# Allegro board sensor.brd
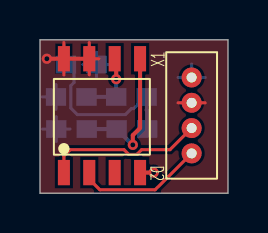
[diagram p0: board, top side]
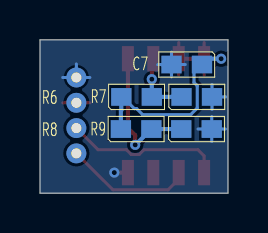
[diagram p1: board, bottom side, seen from below]

Outline 9.4 x 7.7 mm; copper layers: TOP, BOTTOM. Coordinates in mm from the lower left corner of the outline.
Outline path: 0,7.7 0,0 9.4,0 9.4,7.7 0,7.7

## Placement (name value [footprint] x y rotation side)
C7  0.1uF  [0402]  1.3 6.46 0 bottom
D2  TMP275  [SO8]  1.19 1.03 90 top
R6  10k  [0402]  5.33 4.83 180 bottom
R7  10k  [0402]  2.32 4.83 180 bottom
R8  10k  [0402]  5.36 3.22 180 bottom
R9  10k  [0402]  2.34 3.22 180 bottom
X1  HEADER 4  [SIP4_TMP]  12.66 2 90 top

## Library data of the parts
C7 = 0.01uFCapacitor16V10%0402
D2 = AT24C04_2
R6-R9 = R1005_0
X1 = HEADER 4

## Footprints (pads in the part's own frame, mm; a bottom-side part is the same pattern mirrored in y, then rotated)
0402
  rect 1.016x0.889 smd: 1(0,0) 2(1.524,0)
SIP4_TMP
  round 1 hole 0.5: 1(0,5.08) 2(1.27,5.08) 3(2.54,5.08) 4(3.81,5.08)
SO8
  rect 1.27x0.6 smd: 1(0,0) 2(0,-1.27) 3(0,-2.54) 4(0,-3.81) 5(5.715,-3.81) 6(5.715,-2.54) 7(5.715,-1.27) 8(5.715,0)

## Nets
+3.3VD: C7.1 D2.7(A0) D2.8(VCC) R6.1 R8.1 X1.3
DGND: C7.2 D2.4(GND) R7.2 R9.2 X1.4
A1: D2.6(A1) R6.2 R7.1
A2: D2.5(A2) R8.2 R9.1
SCL: D2.2(SCL) X1.1
SDA: D2.1(SDA) X1.2

Pads without a net: D2 3

## Via types
v1: diameter 0.508, hole 0.254, TOP to BOTTOM, 4 vias

## Routing (per net, layer and track width the routed paths; a pad name or vN(x,y) marks a point on that pad's centre or on a via; arc(x,y) is an arc through that point)
+3.3VD: length 16.6
  TOP w0.152: 1.19,5.94 D2.8 1.19,7.56 ; D2.7 2.94,6.75 ; D2.7 2.46,5.94 ; D2.7 2.46,7.56 ; 6.91,4.54 X1.3 8.26,4.54
  TOP w0.203: D2.7 D2.8 v1(0.34,6.75)
  BOTTOM w0.152: C7.1 1.7,6.06 1.7,5.56 1.54,5.39 1.54,4.27 1.87,3.94 4.27,3.94 4.57,4.24 4.68,4.24 5.27,4.83 R6.1
  BOTTOM w0.203: R8.1 5.36,4.14 5.33,4.16 R6.1 ; v1(0.34,6.75) 1.01,6.75 C7.1
DGND: length 9.9
  TOP w0.203: D2.4 v1(5.69,1.03)
  BOTTOM w0.152: R9.2 1.5,3.22 ; R9.2 0.13,3.22 ; R9.2 0.81,2.6 ; R9.2 0.81,3.84 ; C7.2 2.83,7.08 ; C7.2 3.51,6.46 ; C7.2 2.14,6.46 ; C7.2 2.83,5.83 ; R7.2 0.8,5.45 ; R7.2 0.8,4.21 ; R7.2 0.12,4.83 ; X1.4 7.58,6.48 ; X1.4 6.91,5.81 ; X1.4 8.26,5.81
A1: length 3.4
  TOP w0.203: v1(3.81,5.72) 3.81,6.67 D2.6
  BOTTOM w0.203: v1(3.81,5.72) R6.2 R7.1
A2: length 7.1
  TOP w0.203: v1(4.64,2.42) 4.64,2.91 5,3.27 D2.5
  BOTTOM w0.203: v1(4.64,2.42) 4.53,2.54 4.51,2.54 R8.2 R9.1
SCL: length 6.4
  TOP w0.152: X1.1 5.76,0.17 2.99,0.17 2.46,0.7 D2.2
SDA: length 8
  TOP w0.152: D2.1 1.19,1.87 1.5,2.18 4.2,2.18 4.44,1.94 4.84,1.94 5.08,2.18 6.5,2.18 X1.2

## Copper pours and planes (outline as drawn; the poured copper is in the pictures)
+3.3VD on TOP: 0,-0.01 0,7.69 9.4,7.69 9.4,-0.01
DGND on BOTTOM: 0,-0.01 0,7.69 9.4,7.69 9.4,-0.01

## Text on the board
NCLEGEND-1-2: FIGURE | SIZE | 10.0 | 19.685 | DRILL CHART: TOP to BOTTOM | ALL UNITS ARE IN MILS | PLATED | QTY | 4
